# Altium PCB SingleLEDArrayBAK.PcbDoc
Units mm, origin at the board's own origin, x right, y up, seen from the top; angles counter-clockwise.
Board outline 132.72 x 24.13 mm, 2 copper layers (Top Layer, Bottom Layer); 8 components, 0 nets, 48 pads, 24 vias.
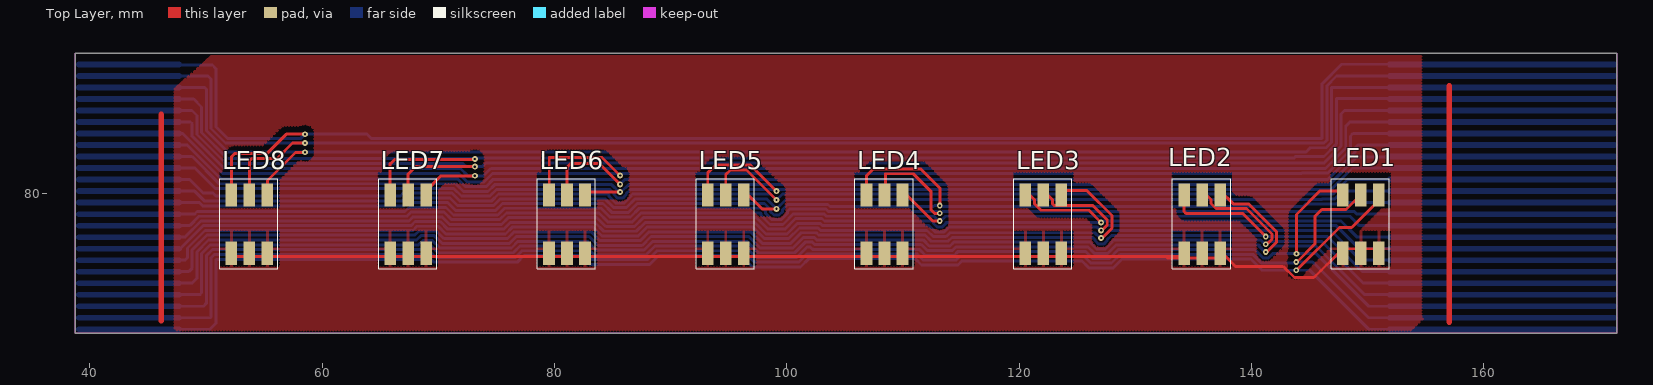
[diagram p0: Top Layer view]
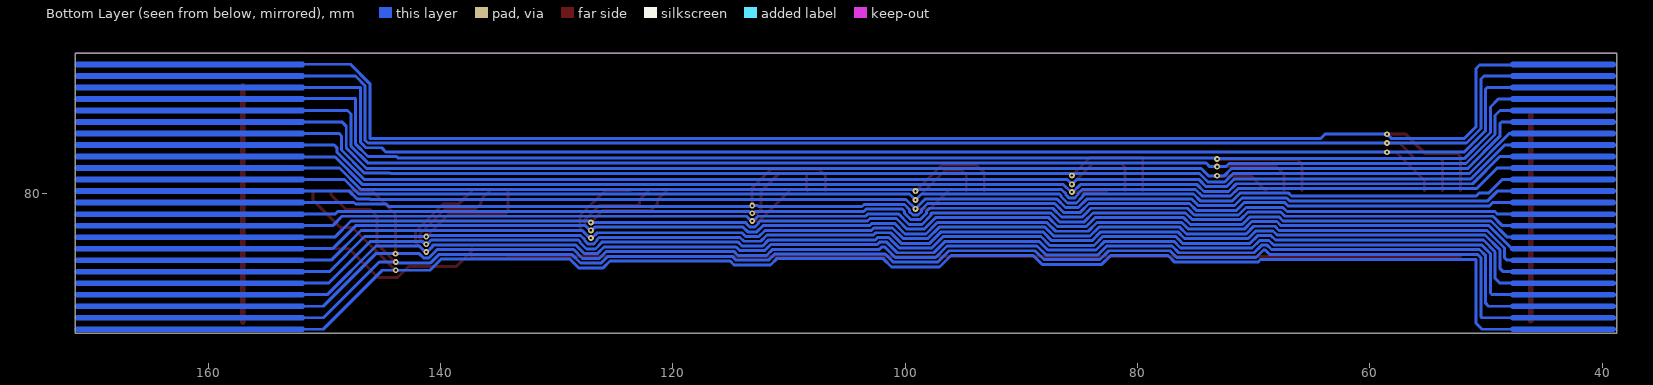
[diagram p1: Bottom Layer view, seen from below]

## Layer stack, top to bottom
Top Layer: signal copper 0.0356
Dielectric: dielectric 0.32, FR-4, Dk 4.8
Bottom Layer: signal copper 0.0356

## Board outline
171.45,67.945 171.45,92.075 38.735,92.075 38.735,67.945
cut-out: 38.735,67.945 38.735,92.075 171.45,92.075 171.45,67.945

## Design rules (kind name [scope] priority, off if disabled: settings)
Clearance [All] p1: gap=0.152
PolygonConnect [All] p1: connectstyle=Relief reliefconductorwidth=0.254 reliefentries=4 polygonreliefangle="90 Angle"
RoutingVias [All] p1: holewidth=0.711 width=1.27 viastyle="Through Hole" minholewidth=0.711 minwidth=1.27 maxholewidth=0.711 maxwidth=1.27
SilkscreenOverComponentPads [All] p1: minsilkscreentomaskgap=0.254
SolderMaskExpansion [All] p1: expansion=0.102
Width [All] p1: maxlimit=2.54 minlimit=0.102 preferedwidth=0.254 minimp=50.000000 maximp=50.000000 favimp=50.000000
27 further rules are at their usual default settings.

## Components (designator, comment, footprint, x,y, rotation, side; value= is the part's Value field where it differs from the comment)
LED1 "5050RGBLED" "5050 cRGBLED" 149.411,77.349 r90 top
LED2 "5050RGBLED" "5050 cRGBLED" 135.744,77.349 r90 top
LED3 "5050RGBLED" "5050 cRGBLED" 122.077,77.349 r90 top
LED4 "5050RGBLED" "5050 cRGBLED" 108.41,77.349 r90 top
LED5 "5050RGBLED" "5050 cRGBLED" 94.743,77.349 r90 top
LED6 "5050RGBLED" "5050 cRGBLED" 81.076,77.349 r90 top
LED7 "5050RGBLED" "5050 cRGBLED" 67.409,77.349 r90 top
LED8 "5050RGBLED" "5050 cRGBLED" 53.742,77.349 r90 top

## Footprints (in the part's own frame and the unit in brackets; to place one, negate y for a bottom-side part, rotate by r counter-clockwise, add the part's x,y. Pads: shape width x height; smd on the part's side, far side on the other; paste and mask are expansions set on the pad)
"5050 cRGBLED" [mm] "5050 RGBLED"
  rect 2x1 smd: 1(-2.5,1.55) 2(2.5,1.55) 3(-2.5,0) 4(2.5,0) 5(-2.5,-1.55) 6(2.5,-1.55)
  silkscreen extent -3.85,-2.45 3.9,2.55

## Part data
LED1 LED2 LED3 LED4 LED5 LED6 LED7 LED8: "5050 RGB LED"

## Via types
v1: diameter 0.5, hole 0.2, Top Layer to Bottom Layer, 24 vias

## Nets (pads, with @x,y where several pads share a name; then routed paths per layer and width w, separated by ;. In a path a pad name is that pad's centre, name@x,y a point inside that pad or via, vN(x,y) a via of type N, cw(c..) or ccw(c..) an arc to the next point about the centre after c; other vN are vias at no path point)
pads on no net: LED1.1 LED1.2 LED1.3 LED1.4 LED1.5 LED1.6 LED2.1 LED2.2 LED2.3 LED2.4 LED2.5 LED2.6 LED3.1 LED3.2 LED3.3 LED3.4 LED3.5 LED3.6 LED4.1 LED4.2 LED4.3 LED4.4 LED4.5 LED4.6 LED5.1 LED5.2 LED5.3 LED5.4 LED5.5 LED5.6 LED6.1 LED6.2 LED6.3 LED6.4 LED6.5 LED6.6 LED7.1 LED7.2 LED7.3 LED7.4 LED7.5 LED7.6 LED8.1 LED8.2 LED8.3 LED8.4 LED8.5 LED8.6
copper on no net: | length 3819.6
  Top Layer w0.254: 52.192,80.23 52.192,83.155 52.451,83.414 55.246,83.414 56.922,85.09 v1(58.522,85.09) ; 52.217,74.544 55.292,74.544 67.409,74.544 79.551,74.544 82.626,74.544 106.86,74.544 109.96,74.544 120.527,74.544 132.639,74.544 ; 53.742,80.23 53.746,80.235 53.746,82.804 53.95,83.007 56.134,83.007 57.455,84.328 v1(58.522,84.328) ; 55.292,80.23 55.292,81.098 57.709,83.515 58.496,83.515 v1(58.522,83.541) ; 65.837,82.55 65.859,82.528 ; 65.859,80.23 65.859,82.528 ; 67.409,80.23 67.409,81.658 68.047,82.296 v1(73.152,82.296) ; 68.959,80.23 70.237,81.509 v1(73.152,81.509) ; v1(73.152,82.956) 73.116,82.92 66.251,82.92 65.859,82.528 ; 79.526,80.23 79.553,80.257 79.553,83.083 84.099,83.083 v1(85.649,81.534) ; 81.076,80.23 81.076,82.244 81.407,82.575 83.845,82.575 v1(85.649,80.772) ; 82.626,80.23 82.745,80.112 v1(85.649,80.112) ; 93.193,80.23 93.193,81.763 93.878,82.448 96.85,82.448 v1(99.111,80.188) ; 94.743,80.23 94.743,81.611 95.148,82.017 96.52,82.017 v1(99.111,79.426) ; 96.293,80.23 97.859,78.664 v1(99.111,78.664) ; 106.86,80.23 106.86,81.511 107.442,82.093 111.531,82.093 113.182,80.442 113.182,78.969 v1(113.157,78.943) ; 108.41,80.23 108.509,80.329 108.509,81.686 110.871,81.686 112.42,80.137 112.42,78.562 112.7,78.283 v1(113.157,78.283) ; 109.96,80.23 112.568,77.622 v1(113.157,77.622) ; 120.527,80.23 121.298,79.46 121.298,79.114 121.868,78.544 126.002,78.544 v1(127.051,77.495) ; 122.077,80.23 122.848,79.46 122.848,79.114 123.011,78.951 126.357,78.951 126.357,78.937 127.58,77.715 127.58,77.276 127.114,76.81 v1(127.051,76.81) ; 123.627,80.23 125.84,80.23 127.987,78.084 127.987,76.997 127.139,76.149 v1(127.051,76.149) ; 134.194,80.23 134.194,78.429 134.341,78.283 139.217,78.283 v1(141.224,76.276) ; 134.219,74.544 132.639,74.544 ; 135.744,80.23 136.515,79.46 136.515,79.114 136.94,78.689 139.56,78.689 141.753,76.495 141.753,76.057 141.312,75.616 v1(141.224,75.616) ; 137.294,74.426 132.757,74.426 132.639,74.544 ; 137.294,75.23 137.294,75.05 138.633,73.711 142.723,73.711 143.688,72.746 145.376,72.746 147.861,75.23 149.411,75.23 150.961,75.23 ; 137.294,80.23 138.429,79.096 139.728,79.096 142.16,76.664 142.16,75.803 141.312,74.955 v1(141.224,74.955) ; 137.319,74.544 137.362,74.502 ; v1(143.84,73.381) 143.878,73.381 147.561,77.064 148.615,77.064 150.961,79.409 150.961,80.23 ; v1(143.84,74.092) 143.903,74.092 145.466,75.655 145.466,78.029 146.05,78.613 148.139,78.613 149.411,79.885 149.411,80.23 ; v1(143.866,74.803) 143.866,78.181 145.898,80.213 147.844,80.213 147.861,80.23
  Top Layer w0.5: 46.152,69.037 46.152,86.792 ; 157.02,68.933 157.02,89.23
  Bottom Layer w0.254: 46.379,70.282 49.784,70.282 50.038,70.536 50.038,74.632 50.565,75.159 68.462,75.159 68.843,75.54 69.318,75.54 69.975,74.883 76.459,74.883 77.039,75.463 82.651,75.463 83.409,74.705 87.888,74.705 88.646,75.463 96.39,75.463 97.376,74.477 100.845,74.477 101.756,75.387 102.022,75.387 102.226,75.184 111.398,75.184 111.928,74.655 114.386,74.655 114.712,74.981 125.746,74.981 126.327,74.401 127.775,74.401 128.533,75.159 140.272,75.159 141.005,74.426 141.443,74.426 141.82,74.803 v1(143.866,74.803) 145.567,74.803 150.089,70.282 155.512,70.282 ; 46.379,71.272 49.479,71.272 49.632,71.425 49.632,74.8 50.397,75.565 68.294,75.565 68.675,75.946 69.487,75.946 70.143,75.29 76.291,75.29 76.871,75.87 82.82,75.87 83.578,75.112 87.72,75.112 88.478,75.87 96.558,75.87 97.545,74.883 100.677,74.883 101.587,75.794 102.191,75.794 102.394,75.59 111.567,75.59 112.096,75.061 114.218,75.061 114.544,75.387 125.915,75.387 126.495,74.807 127.607,74.807 128.365,75.565 140.612,75.565 140.695,75.482 140.695,75.397 141.136,74.955 v1(141.224,74.955) 141.312,74.955 141.82,75.463 145.542,75.463 149.733,71.272 155.512,71.272 ; 46.379,72.263 48.806,72.263 49.225,72.682 49.225,74.968 50.228,75.971 68.125,75.971 68.506,76.352 69.655,76.352 70.311,75.696 76.122,75.696 76.703,76.276 82.988,76.276 83.746,75.518 87.551,75.518 88.309,76.276 96.727,76.276 97.713,75.29 100.508,75.29 101.419,76.2 102.359,76.2 102.562,75.997 111.735,75.997 112.264,75.467 114.05,75.467 114.376,75.794 126.115,75.794 126.115,75.762 126.663,75.213 127.438,75.213 127.987,75.762 127.987,75.847 128.111,75.971 140.78,75.971 141.136,75.616 v1(141.224,75.616) 141.312,75.616 141.566,75.87 146.025,75.87 149.631,72.263 155.512,72.263 ; 46.379,73.254 48.514,73.254 48.819,73.558 48.819,75.137 50.085,76.403 67.982,76.403 68.338,76.759 69.823,76.759 70.48,76.102 75.954,76.102 76.534,76.683 83.156,76.683 83.914,75.925 87.383,75.925 88.141,76.683 96.895,76.683 97.882,75.696 100.34,75.696 101.25,76.606 102.527,76.606 102.731,76.403 111.903,76.403 112.433,75.874 113.881,75.874 114.207,76.2 126.337,76.2 126.521,76.016 126.521,75.93 126.832,75.62 127.27,75.62 127.58,75.93 127.58,76.016 127.942,76.378 140.948,76.378 141.05,76.276 v1(141.224,76.276) 146.533,76.276 149.555,73.254 155.512,73.254 ; 46.379,76.225 48.183,76.225 49.58,77.622 67.477,77.622 67.833,77.978 70.328,77.978 70.985,77.322 75.449,77.322 76.029,77.902 83.662,77.902 84.42,77.144 86.878,77.144 87.636,77.902 97.4,77.902 98.387,76.915 99.835,76.915 100.745,77.826 103.032,77.826 103.236,77.622 112.494,77.622 112.628,77.489 112.628,77.403 112.938,77.093 113.376,77.093 113.686,77.403 113.686,77.489 113.693,77.495 v1(127.051,77.495) 127.178,77.622 147.701,77.622 149.098,76.225 155.512,76.225 ; 46.379,77.216 48.599,77.216 49.412,78.029 67.309,78.029 67.665,78.384 70.497,78.384 71.153,77.728 75.281,77.728 75.861,78.308 83.83,78.308 84.588,77.55 86.71,77.55 87.468,78.308 97.742,78.308 97.769,78.282 97.769,78.108 98.555,77.322 99.667,77.322 100.577,78.232 103.201,78.232 103.404,78.029 112.662,78.029 113.069,77.622 v1(113.157,77.622) 113.245,77.622 113.652,78.029 148.463,78.029 149.276,77.216 155.512,77.216 ; 46.379,78.207 49.015,78.207 49.244,78.435 67.141,78.435 67.496,78.791 70.665,78.791 71.321,78.134 75.112,78.134 75.692,78.715 83.998,78.715 84.756,77.957 86.541,77.957 87.299,78.715 97.911,78.715 98.175,78.45 98.175,78.276 98.723,77.728 99.498,77.728 100.047,78.276 100.047,78.45 100.235,78.638 103.369,78.638 103.572,78.435 112.916,78.435 113.069,78.283 v1(113.157,78.283) 113.245,78.283 113.398,78.435 148.844,78.435 149.073,78.207 155.512,78.207 ; 46.379,79.197 49.447,79.197 49.726,78.918 67.049,78.918 67.328,79.197 70.833,79.197 71.49,78.541 74.944,78.541 75.524,79.121 84.167,79.121 84.925,78.363 86.373,78.363 87.131,79.121 98.079,79.121 98.581,78.618 98.581,78.445 98.892,78.134 99.33,78.134 99.64,78.445 99.64,78.618 100.067,79.045 103.537,79.045 103.715,78.867 112.626,78.867 112.702,78.943 v1(113.157,78.943) 113.233,78.867 144.45,78.867 144.653,79.07 147.308,79.07 147.435,79.197 155.512,79.197 ; 46.379,80.188 49.031,80.188 49.895,79.324 66.88,79.324 67.16,79.604 71.002,79.604 71.658,78.947 74.776,78.947 75.356,79.527 84.335,79.527 85.093,78.769 86.205,78.769 86.963,79.527 98.247,79.527 v1(99.111,78.664) 99.924,79.477 146.075,79.477 146.126,79.527 147.19,79.527 147.851,80.188 155.512,80.188 ; 46.379,81.178 48.615,81.178 49.784,80.01 50.601,80.01 50.851,79.76 66.741,79.76 66.991,80.01 71.17,80.01 71.826,79.354 74.607,79.354 75.187,79.934 84.589,79.934 84.713,79.81 84.713,79.724 85.261,79.176 86.036,79.176 86.585,79.724 86.585,79.81 86.709,79.934 98.603,79.934 v1(99.111,79.426) 99.619,79.934 147.022,79.934 148.267,81.178 155.512,81.178 ; 46.379,82.169 49.047,82.169 50.8,80.416 71.338,80.416 71.995,79.76 74.439,79.76 75.019,80.34 84.757,80.34 85.119,79.978 85.119,79.892 85.43,79.582 85.868,79.582 86.178,79.892 86.178,79.978 86.54,80.34 98.958,80.34 v1(99.111,80.188) 99.263,80.34 146.854,80.34 148.683,82.169 155.512,82.169 ; 46.379,83.16 48.819,83.16 51.156,80.823 71.507,80.823 72.163,80.166 74.271,80.166 74.851,80.747 84.926,80.747 85.561,80.112 v1(85.649,80.112) 85.737,80.112 86.372,80.747 146.685,80.747 149.06,83.121 155.474,83.121 ; 46.379,84.15 48.403,84.15 51.324,81.229 71.675,81.229 72.331,80.573 74.102,80.573 74.733,81.204 85.217,81.204 v1(85.649,80.772) 86.081,81.204 146.568,81.204 148.92,83.556 148.92,83.922 149.149,84.15 155.512,84.15 ; 46.379,85.141 48.006,85.141 51.435,81.712 71.767,81.712 72.5,80.979 73.934,80.979 74.667,81.712 85.471,81.712 v1(85.649,81.534) 85.827,81.712 144.297,81.712 144.323,81.737 146.527,81.737 148.514,83.724 148.514,84.938 148.717,85.141 155.512,85.141 ; 46.379,86.131 48.666,86.131 48.819,85.979 48.819,84.903 51.578,82.144 71.91,82.144 72.545,81.509 v1(73.152,81.509) 73.889,81.509 74.524,82.144 146.358,82.144 148.107,83.893 148.107,85.776 148.488,86.157 155.487,86.157 ; 46.379,87.122 48.793,87.122 49.225,86.69 49.225,85.071 51.721,82.575 72.139,82.575 72.418,82.296 v1(73.152,82.296) 73.784,82.296 74.089,82.601 142.773,82.601 142.795,82.622 146.262,82.622 147.701,84.061 147.701,86.817 148.006,87.122 155.512,87.122 ; 46.379,88.113 48.946,88.113 49.632,87.427 49.632,85.239 51.889,82.982 73.127,82.982 v1(73.152,82.956) 73.224,83.029 143.637,83.029 143.768,83.16 146.225,83.16 147.295,84.229 147.295,88.163 155.461,88.163 ; 46.379,90.094 50.19,90.094 50.444,89.84 50.444,85.576 51.692,84.328 v1(58.522,84.328) 146.244,84.328 146.482,84.566 146.482,89.265 147.311,90.094 155.512,90.094 ; 46.379,91.034 50.571,91.034 50.851,90.754 50.851,85.744 51.861,84.734 58.166,84.734 v1(58.522,85.09) 63.856,85.09 64.211,84.734 146.075,84.734 146.075,89.433 147.752,91.11 151.892,91.11 ; 46.922,69.291 50.368,69.291 50.444,69.367 50.444,74.463 50.733,74.752 68.63,74.752 69.011,75.133 69.15,75.133 69.806,74.477 76.627,74.477 77.208,75.057 82.483,75.057 83.241,74.299 88.056,74.299 88.814,75.057 96.222,75.057 97.208,74.07 101.013,74.07 101.721,74.778 111.23,74.778 111.759,74.248 114.555,74.248 114.881,74.574 125.578,74.574 126.158,73.994 127.943,73.994 128.701,74.752 140.104,74.752 140.836,74.02 143.768,74.02 v1(143.84,74.092) 145.263,74.092 150.063,69.291 155.512,69.291 ; 47.684,68.301 50.346,68.301 50.851,68.806 50.851,74.295 69.413,74.295 69.638,74.07 76.796,74.07 77.376,74.651 82.315,74.651 83.073,73.893 88.225,73.893 88.983,74.651 96.053,74.651 97.04,73.664 101.182,73.664 101.889,74.371 111.062,74.371 111.591,73.842 114.723,73.842 115.049,74.168 125.41,74.168 125.99,73.588 128.112,73.588 128.87,74.346 139.935,74.346 140.901,73.381 v1(143.84,73.381) 145.009,73.381 150.089,68.301 155.512,68.301 ; 47.684,74.244 48.209,74.244 48.412,74.447 48.412,75.305 49.917,76.81 67.814,76.81 68.17,77.165 69.992,77.165 70.648,76.509 75.786,76.509 76.366,77.089 83.325,77.089 84.083,76.331 87.215,76.331 87.973,77.089 97.063,77.089 98.05,76.102 100.172,76.102 101.082,77.013 102.696,77.013 102.899,76.81 112.072,76.81 112.601,76.28 113.713,76.28 114.039,76.606 126.505,76.606 126.963,76.149 v1(127.051,76.149) 127.139,76.149 127.799,76.81 146.837,76.81 149.403,74.244 155.512,74.244 ; 47.684,89.103 49.911,89.103 50.038,88.976 50.038,85.408 51.905,83.541 v1(58.522,83.541) 58.547,83.566 144.704,83.566 145.059,83.922 146.412,83.922 146.888,84.398 146.888,89.097 146.895,89.103 155.512,89.103 ; 47.767,75.235 49.749,77.216 67.646,77.216 68.001,77.572 70.16,77.572 70.816,76.915 75.617,76.915 76.197,77.495 83.493,77.495 84.251,76.737 87.046,76.737 87.804,77.495 97.232,77.495 98.218,76.509 100.003,76.509 100.914,77.419 102.864,77.419 103.067,77.216 112.24,77.216 112.769,76.687 113.545,76.687 113.947,77.089 126.709,77.089 126.988,76.81 v1(127.051,76.81) 127.114,76.81 127.52,77.216 147.295,77.216 149.276,75.235 157.02,75.235 ; 151.892,83.121 155.512,83.16 ; 151.892,86.157 155.512,86.131 ; 151.892,88.163 155.512,88.113 ; 156.969,88.163 171.228,88.113 ; 156.982,83.121 171.228,83.16 ; 156.995,86.157 171.228,86.131
  Bottom Layer w0.5: 39.064,68.301 47.684,68.301 ; 39.064,69.291 47.684,69.291 ; 39.064,70.282 47.684,70.282 ; 39.064,71.272 47.684,71.272 ; 39.064,72.263 47.684,72.263 ; 39.064,73.254 47.684,73.254 ; 39.064,74.244 47.684,74.244 ; 39.064,75.235 47.684,75.235 ; 39.064,76.225 47.684,76.225 ; 39.064,77.216 47.684,77.216 ; 39.064,78.207 47.684,78.207 ; 39.064,79.197 47.684,79.197 ; 39.064,80.188 47.684,80.188 ; 39.064,81.178 47.684,81.178 ; 39.064,82.169 47.684,82.169 ; 39.064,83.16 47.684,83.16 ; 39.064,84.15 47.684,84.15 ; 39.064,85.141 47.684,85.141 ; 39.064,86.131 47.684,86.131 ; 39.064,87.122 47.684,87.122 ; 39.064,88.113 47.684,88.113 ; 39.064,89.103 47.684,89.103 ; 39.064,90.094 47.684,90.094 ; 39.064,91.084 47.684,91.084 ; 151.892,68.301 171.228,68.301 ; 151.892,69.291 171.228,69.291 ; 151.892,70.282 171.228,70.282 ; 151.892,71.272 171.228,71.272 ; 151.892,72.263 171.228,72.263 ; 151.892,73.254 171.228,73.254 ; 151.892,74.244 171.228,74.244 ; 151.892,76.225 171.228,76.225 ; 151.892,77.216 171.228,77.216 ; 151.892,78.207 171.228,78.207 ; 151.892,80.188 157.02,80.188 171.228,80.188 ; 151.892,81.178 157.02,81.178 171.228,81.178 ; 151.892,82.169 157.02,82.169 171.228,82.169 ; 151.892,83.16 157.02,83.16 171.228,83.16 ; 151.892,84.15 157.02,84.15 171.228,84.15 ; 151.892,85.141 157.02,85.141 171.228,85.141 ; 151.892,86.131 157.02,86.131 171.228,86.131 ; 151.892,87.122 157.02,87.122 171.228,87.122 ; 151.892,88.113 157.02,88.113 171.228,88.113 ; 151.892,89.103 157.02,89.103 171.228,89.103 ; 151.892,90.094 157.02,90.094 171.228,90.094 ; 151.892,91.084 171.228,91.084 ; 157.02,75.235 151.892,75.235 171.228,75.235 ; 157.02,79.197 151.892,79.197 171.228,79.197

## Polygon pours and split planes (outlines as drawn)
no net on Top Layer "Top Layer-No Net" (hatched 90Degree grid 0.254 track 0.254, remove dead copper, pour order 2): 47.244,88.906 47.319,88.838 47.319,68.25 153.68,68.25 154.711,69.175 154.586,69.288 154.586,91.796 50.464,91.796 47.319,88.974